# Altium PCB Dekor Natal.PcbDoc (part 2 of 2)
Units mm, origin at the board's own origin, x right, y up, seen from the top; angles counter-clockwise.
Board outline 200 x 100 mm, 4 copper layers (Top Layer, Internal Plane 1, Internal Plane 2, Bottom Layer), stack 0.462 mm thick; 210 components, 0 nets, 807 pads, 0 vias.
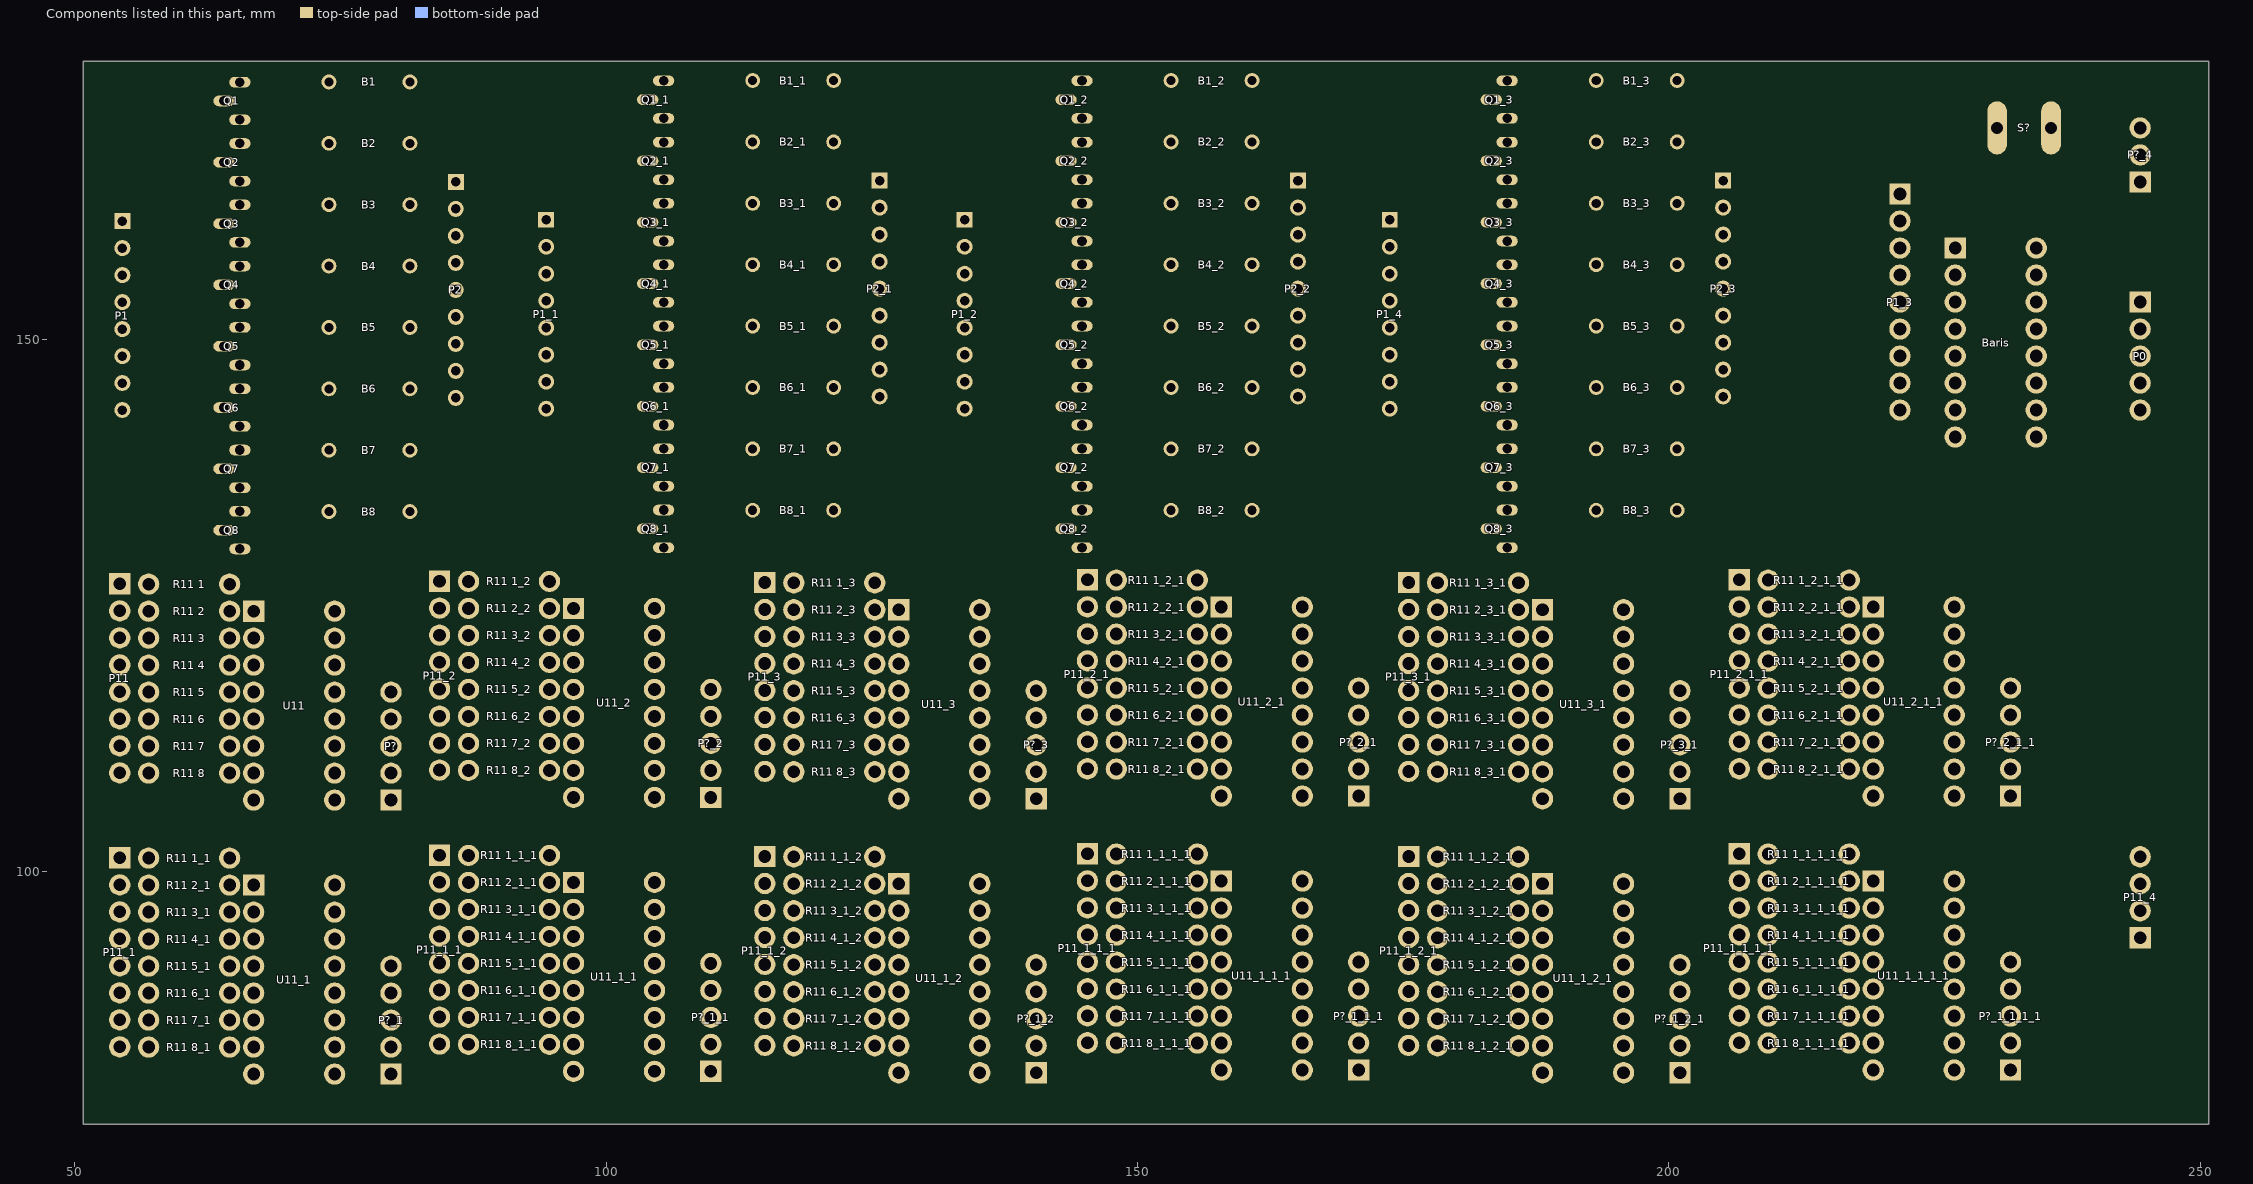
[diagram p4: the components of this part, seen from the top]

## Nets (pads, with @x,y where several pads share a name; then routed paths per layer and width w, separated by ;. In a path a pad name is that pad's centre, name@x,y a point inside that pad or via, vN(x,y) a via of type N, cw(c..) or ccw(c..) an arc to the next point about the centre after c; other vN are vias at no path point) (continued)
copper on no net: | length 3811.2
  Bottom Layer w1: 54.229,83.464 55.601,83.464 55.626,83.439 56.952,83.439 ; 54.229,86.004 55.601,86.004 55.626,85.979 56.952,85.979 ; 54.229,88.544 55.601,88.544 55.626,88.519 56.952,88.519 ; 54.229,91.084 55.601,91.084 55.626,91.059 56.952,91.059 ; 54.229,93.624 55.601,93.624 55.626,93.599 56.952,93.599 ; 54.229,96.164 55.601,96.164 55.626,96.139 56.952,96.139 ; 54.229,98.704 55.601,98.704 55.626,98.679 56.952,98.679 ; 54.229,101.244 55.601,101.244 55.626,101.219 56.952,101.219 ; 54.229,109.245 55.601,109.245 55.626,109.22 56.952,109.22 ; 54.229,111.785 55.601,111.785 55.626,111.76 56.952,111.76 ; 54.229,114.325 55.601,114.325 55.626,114.3 56.952,114.3 ; 54.229,116.865 55.601,116.865 55.626,116.84 56.952,116.84 ; 54.229,119.405 55.601,119.405 55.626,119.38 56.952,119.38 ; 54.229,121.945 55.601,121.945 55.626,121.92 56.952,121.92 ; 54.229,124.485 55.601,124.485 55.626,124.46 56.952,124.46 ; 54.229,127.025 55.601,127.025 55.626,127 56.952,127 ; 54.483,143.383 54.483,141.629 64.032,132.08 ; 54.483,145.923 56.388,145.923 63.221,139.09 64.032,137.849 ; 54.483,148.463 56.845,148.463 61.689,143.619 64.032,143.619 ; 54.483,151.003 58.38,151.003 59.995,149.388 64.032,149.388 ; 54.483,153.543 58.38,153.543 59.995,155.158 64.032,155.158 ; 54.483,156.083 58.293,156.083 62.332,160.122 62.332,160.927 64.032,160.927 ; 54.483,158.623 55.581,158.623 63.221,166.697 64.032,166.697 ; 54.483,161.163 63.221,169.901 63.221,172.466 64.032,172.466 ; 64.572,83.439 66.833,83.439 ; 64.572,85.979 66.833,85.979 ; 64.572,88.519 66.833,88.519 ; 64.572,91.059 66.833,91.059 ; 64.572,93.599 66.833,93.599 ; 64.572,96.139 66.833,96.139 ; 64.572,98.679 66.833,98.679 ; 64.572,101.219 68.072,101.219 73.152,96.139 74.453,96.139 ; 64.572,109.22 66.833,109.22 ; 64.572,111.76 66.833,111.76 ; 64.572,114.3 66.833,114.3 ; 64.572,116.84 66.833,116.84 ; 64.572,119.38 66.833,119.38 ; 64.572,121.92 66.833,121.92 ; 64.572,124.46 66.833,124.46 ; 64.572,127 68.072,127 73.152,121.92 74.453,121.92 ; 65.532,130.31 75.04,130.31 75.921,131.191 75.921,135.001 74.842,136.079 ; 65.532,133.85 70.314,133.85 70.339,133.825 73.914,133.825 ; 65.532,136.079 74.842,136.079 ; 65.532,139.619 69.731,139.619 69.748,139.602 73.914,139.602 ; 65.532,141.849 74.168,141.849 ; 65.532,145.389 69.738,145.389 69.748,145.378 73.914,145.378 ; 65.532,147.618 74.72,147.618 ; 65.532,151.158 67.052,151.158 67.056,151.155 73.914,151.155 ; 65.532,153.388 74.521,153.388 ; 65.532,156.928 69.745,156.928 69.748,156.931 73.914,156.931 ; 65.532,159.157 74.372,159.157 ; 65.532,162.697 73.034,162.697 73.044,162.708 73.914,162.708 ; 65.532,164.927 74.168,164.927 ; 65.532,168.467 69.731,168.467 69.748,168.484 73.914,168.484 ; 65.532,170.696 75.151,170.696 ; 65.532,174.236 69.723,174.236 69.748,174.261 73.914,174.261 ; 74.453,83.439 79.756,83.439 80.518,83.439 82.017,84.938 82.017,93.32 76.657,98.679 74.453,98.679 ; 74.453,85.979 79.756,85.979 ; 74.453,88.519 79.756,88.519 ; 74.453,91.059 72.898,91.059 72.187,90.348 72.187,81.28 71.806,80.899 66.833,80.899 69.094,78.638 77.495,78.638 79.756,80.899 ; 74.453,93.599 77.216,93.599 79.756,91.059 ; 74.453,109.22 79.756,109.22 80.518,109.22 82.017,110.719 82.017,119.101 76.657,124.46 74.453,124.46 ; 74.453,111.76 79.756,111.76 ; 74.453,114.3 79.756,114.3 ; 74.453,116.84 72.898,116.84 72.187,116.129 72.187,107.061 71.806,106.68 66.833,106.68 69.094,104.419 77.495,104.419 79.756,106.68 ; 74.453,119.38 77.216,119.38 79.756,116.84 ; 81.534,133.825 85.852,138.143 85.852,144.526 ; 81.534,139.602 83.541,141.608 83.541,146.431 84.176,147.066 85.852,147.066 ; 81.534,145.378 81.534,148.412 82.423,149.301 84.684,149.301 84.988,149.606 85.852,149.606 ; 81.534,151.155 82.525,152.146 85.852,152.146 ; 81.534,156.931 83.779,154.686 85.852,154.686 ; 81.534,162.708 81.534,160.534 84.842,157.226 85.852,157.226 ; 81.534,168.484 79.534,166.484 79.534,132.997 80.706,131.825 82.362,131.825 87.902,137.365 87.902,158.075 86.701,159.276 86.342,159.276 85.852,159.766 ; 81.534,174.261 88.243,167.552 88.243,163.681 86.868,162.306 85.852,162.306 ; 84.328,83.718 85.7,83.718 85.725,83.693 87.051,83.693 ; 84.328,86.258 85.7,86.258 85.725,86.233 87.051,86.233 ; 84.328,88.798 85.7,88.798 85.725,88.773 87.051,88.773 ; 84.328,91.338 85.7,91.338 85.725,91.313 87.051,91.313 ; 84.328,93.878 85.7,93.878 85.725,93.853 87.051,93.853 ; 84.328,96.418 85.7,96.418 85.725,96.393 87.051,96.393 ; 84.328,98.958 85.7,98.958 85.725,98.933 87.051,98.933 ; 84.328,101.498 85.7,101.498 85.725,101.473 87.051,101.473 ; 84.328,109.499 85.7,109.499 85.725,109.474 87.051,109.474 ; 84.328,112.039 85.7,112.039 85.725,112.014 87.051,112.014 ; 84.328,114.579 85.7,114.579 85.725,114.554 87.051,114.554 ; 84.328,117.119 85.7,117.119 85.725,117.094 87.051,117.094 ; 84.328,119.659 85.7,119.659 85.725,119.634 87.051,119.634 ; 84.328,122.199 85.7,122.199 85.725,122.174 87.051,122.174 ; 84.328,124.739 85.7,124.739 85.725,124.714 87.051,124.714 ; 84.328,127.279 85.7,127.279 85.725,127.254 87.051,127.254 ; 85.852,164.846 83.534,167.164 83.534,169.313 82.151,170.696 75.151,170.696 ; 94.361,143.51 94.361,141.756 103.91,132.207 ; 94.361,146.05 96.266,146.05 103.099,139.217 103.91,137.976 ; 94.361,148.59 96.723,148.59 101.567,143.746 103.91,143.746 ; 94.361,151.13 98.258,151.13 99.873,149.515 103.91,149.515 ; 94.361,153.67 98.258,153.67 99.873,155.285 103.91,155.285 ; 94.361,156.21 98.171,156.21 102.21,160.249 102.21,161.054 103.91,161.054 ; 94.361,158.75 95.459,158.75 103.099,166.824 103.91,166.824 ; 94.361,161.29 103.099,170.028 103.099,172.593 103.91,172.593 ; 94.671,83.693 96.932,83.693 ; 94.671,86.233 96.932,86.233 ; 94.671,88.773 96.932,88.773 ; 94.671,91.313 96.932,91.313 ; 94.671,93.853 96.932,93.853 ; 94.671,96.393 96.932,96.393 ; 94.671,98.933 96.932,98.933 ; 94.671,101.473 98.171,101.473 103.251,96.393 104.552,96.393 ; 94.671,109.474 96.932,109.474 ; 94.671,112.014 96.932,112.014 ; 94.671,114.554 96.932,114.554 ; 94.671,117.094 96.932,117.094 ; 94.671,119.634 96.932,119.634 ; 94.671,122.174 96.932,122.174 ; 94.671,124.714 96.932,124.714 ; 94.671,127.254 98.171,127.254 103.251,122.174 104.552,122.174 ; 104.552,83.693 109.855,83.693 110.617,83.693 112.116,85.192 112.116,93.574 106.756,98.933 104.552,98.933 ; 104.552,86.233 109.855,86.233 ; 104.552,88.773 109.855,88.773 ; 104.552,91.313 102.997,91.313 102.286,90.602 102.286,81.534 101.905,81.153 96.932,81.153 99.193,78.892 107.594,78.892 109.855,81.153 ; 104.552,93.853 107.315,93.853 109.855,91.313 ; 104.552,109.474 109.855,109.474 110.617,109.474 112.116,110.973 112.116,119.355 106.756,124.714 104.552,124.714 ; 104.552,112.014 109.855,112.014 ; 104.552,114.554 109.855,114.554 ; 104.552,117.094 102.997,117.094 102.286,116.383 102.286,107.315 101.905,106.934 96.932,106.934 99.193,104.673 107.594,104.673 109.855,106.934 ; 104.552,119.634 107.315,119.634 109.855,117.094 ; 105.41,130.437 114.918,130.437 115.799,131.318 115.799,135.128 114.72,136.206 ; 105.41,133.977 110.192,133.977 110.217,133.952 113.792,133.952 ; 105.41,136.206 114.72,136.206 ; 105.41,139.746 109.609,139.746 109.626,139.729 113.792,139.729 ; 105.41,141.976 114.046,141.976 ; 105.41,145.516 109.616,145.516 109.626,145.505 113.792,145.505 ; 105.41,147.745 114.598,147.745 ; 105.41,151.285 106.93,151.285 106.934,151.282 113.792,151.282 ; 105.41,153.515 114.399,153.515 ; 105.41,157.055 109.623,157.055 109.626,157.058 113.792,157.058 ; 105.41,159.284 114.25,159.284 ; 105.41,162.824 112.912,162.824 112.922,162.835 113.792,162.835 ; 105.41,165.054 114.046,165.054 ; 105.41,168.594 109.609,168.594 109.626,168.611 113.792,168.611 ; 105.41,170.823 115.029,170.823 ; 105.41,174.363 109.601,174.363 109.626,174.388 113.792,174.388 ; 114.935,83.591 116.307,83.591 116.332,83.566 117.658,83.566 ; 114.935,86.131 116.307,86.131 116.332,86.106 117.658,86.106 ; 114.935,88.671 116.307,88.671 116.332,88.646 117.658,88.646 ; 114.935,91.211 116.307,91.211 116.332,91.186 117.658,91.186 ; 114.935,93.751 116.307,93.751 116.332,93.726 117.658,93.726 ; 114.935,96.291 116.307,96.291 116.332,96.266 117.658,96.266 ; 114.935,98.831 116.307,98.831 116.332,98.806 117.658,98.806 ; 114.935,101.371 116.307,101.371 116.332,101.346 117.658,101.346 ; 114.935,109.372 116.307,109.372 116.332,109.347 117.658,109.347 ; 114.935,111.912 116.307,111.912 116.332,111.887 117.658,111.887 ; 114.935,114.452 116.307,114.452 116.332,114.427 117.658,114.427 ; 114.935,116.992 116.307,116.992 116.332,116.967 117.658,116.967 ; 114.935,119.532 116.307,119.532 116.332,119.507 117.658,119.507 ; 114.935,122.072 116.307,122.072 116.332,122.047 117.658,122.047 ; 114.935,124.612 116.307,124.612 116.332,124.587 117.658,124.587 ; 114.935,127.152 116.307,127.152 116.332,127.127 117.658,127.127 ; 121.412,133.952 125.73,138.27 125.73,144.653 ; 121.412,139.729 123.419,141.735 123.419,146.558 124.054,147.193 125.73,147.193 ; 121.412,145.505 121.412,148.539 122.301,149.428 124.562,149.428 124.866,149.733 125.73,149.733 ; 121.412,151.282 122.403,152.273 125.73,152.273 ; 121.412,157.058 123.657,154.813 125.73,154.813 ; 121.412,162.835 121.412,160.661 124.72,157.353 125.73,157.353 ; 121.412,168.611 119.412,166.611 119.412,133.124 120.584,131.952 122.24,131.952 127.78,137.492 127.78,158.202 126.579,159.403 126.22,159.403 125.73,159.893 ; 121.412,174.388 128.121,167.679 128.121,163.808 126.746,162.433 125.73,162.433 ; 125.278,83.566 127.539,83.566 ; 125.278,86.106 127.539,86.106 ; 125.278,88.646 127.539,88.646 ; 125.278,91.186 127.539,91.186 ; 125.278,93.726 127.539,93.726 ; 125.278,96.266 127.539,96.266 ; 125.278,98.806 127.539,98.806 ; 125.278,101.346 128.778,101.346 133.858,96.266 135.159,96.266 ; 125.278,109.347 127.539,109.347 ; 125.278,111.887 127.539,111.887 ; 125.278,114.427 127.539,114.427 ; 125.278,116.967 127.539,116.967 ; 125.278,119.507 127.539,119.507 ; 125.278,122.047 127.539,122.047 ; 125.278,124.587 127.539,124.587 ; 125.278,127.127 128.778,127.127 133.858,122.047 135.159,122.047 ; 125.73,164.973 123.412,167.291 123.412,169.44 122.029,170.823 115.029,170.823 ; 133.731,143.51 133.731,141.756 143.28,132.207 ; 133.731,146.05 135.636,146.05 142.469,139.217 143.28,137.976 ; 133.731,148.59 136.093,148.59 140.937,143.746 143.28,143.746 ; 133.731,151.13 137.628,151.13 139.243,149.515 143.28,149.515 ; 133.731,153.67 137.628,153.67 139.243,155.285 143.28,155.285 ; 133.731,156.21 137.541,156.21 141.58,160.249 141.58,161.054 143.28,161.054 ; 133.731,158.75 134.829,158.75 142.469,166.824 143.28,166.824 ; 133.731,161.29 142.469,170.028 142.469,172.593 143.28,172.593 ; 135.159,83.566 140.462,83.566 141.224,83.566 142.723,85.065 142.723,93.447 137.363,98.806 135.159,98.806 ; 135.159,86.106 140.462,86.106 ; 135.159,88.646 140.462,88.646 ; 135.159,91.186 133.604,91.186 132.893,90.475 132.893,81.407 132.512,81.026 127.539,81.026 129.8,78.765 138.201,78.765 140.462,81.026 ; 135.159,93.726 137.922,93.726 140.462,91.186 ; 135.159,109.347 140.462,109.347 141.224,109.347 142.723,110.846 142.723,119.228 137.363,124.587 135.159,124.587 ; 135.159,111.887 140.462,111.887 ; 135.159,114.427 140.462,114.427 ; 135.159,116.967 133.604,116.967 132.893,116.256 132.893,107.188 132.512,106.807 127.539,106.807 129.8,104.546 138.201,104.546 140.462,106.807 ; 135.159,119.507 137.922,119.507 140.462,116.967 ; 144.78,130.437 154.288,130.437 155.169,131.318 155.169,135.128 154.09,136.206 ; 144.78,133.977 149.562,133.977 149.587,133.952 153.162,133.952 ; 144.78,136.206 154.09,136.206 ; 144.78,139.746 148.979,139.746 148.996,139.729 153.162,139.729 ; 144.78,141.976 153.416,141.976 ; 144.78,145.516 148.986,145.516 148.996,145.505 153.162,145.505 ; 144.78,147.745 153.968,147.745 ; 144.78,151.285 146.3,151.285 146.304,151.282 153.162,151.282 ; 144.78,153.515 153.769,153.515 ; 144.78,157.055 148.993,157.055 148.996,157.058 153.162,157.058 ; 144.78,159.284 153.62,159.284 ; 144.78,162.824 152.282,162.824 152.292,162.835 153.162,162.835 ; 144.78,165.054 153.416,165.054 ; 144.78,168.594 148.979,168.594 148.996,168.611 153.162,168.611 ; 144.78,170.823 154.399,170.823 ; 144.78,174.363 148.971,174.363 148.996,174.388 153.162,174.388 ; 145.288,83.845 146.66,83.845 146.685,83.82 148.011,83.82 ; 145.288,86.385 146.66,86.385 146.685,86.36 148.011,86.36 ; 145.288,88.925 146.66,88.925 146.685,88.9 148.011,88.9 ; 145.288,91.465 146.66,91.465 146.685,91.44 148.011,91.44 ; 145.288,94.005 146.66,94.005 146.685,93.98 148.011,93.98 ; 145.288,96.545 146.66,96.545 146.685,96.52 148.011,96.52 ; 145.288,99.085 146.66,99.085 146.685,99.06 148.011,99.06 ; 145.288,101.625 146.66,101.625 146.685,101.6 148.011,101.6 ; 145.288,109.626 146.66,109.626 146.685,109.601 148.011,109.601 ; 145.288,112.166 146.66,112.166 146.685,112.141 148.011,112.141 ; 145.288,114.706 146.66,114.706 146.685,114.681 148.011,114.681 ; 145.288,117.246 146.66,117.246 146.685,117.221 148.011,117.221 ; 145.288,119.786 146.66,119.786 146.685,119.761 148.011,119.761 ; 145.288,122.326 146.66,122.326 146.685,122.301 148.011,122.301 ; 145.288,124.866 146.66,124.866 146.685,124.841 148.011,124.841 ; 145.288,127.406 146.66,127.406 146.685,127.381 148.011,127.381 ; 155.631,83.82 157.892,83.82 ; 155.631,86.36 157.892,86.36 ; 155.631,88.9 157.892,88.9 ; 155.631,91.44 157.892,91.44 ; 155.631,93.98 157.892,93.98 ; 155.631,96.52 157.892,96.52 ; 155.631,99.06 157.892,99.06 ; 155.631,101.6 159.131,101.6 164.211,96.52 165.512,96.52 ; 155.631,109.601 157.892,109.601 ; 155.631,112.141 157.892,112.141 ; 155.631,114.681 157.892,114.681 ; 155.631,117.221 157.892,117.221 ; 155.631,119.761 157.892,119.761 ; 155.631,122.301 157.892,122.301 ; 155.631,124.841 157.892,124.841 ; 155.631,127.381 159.131,127.381 164.211,122.301 165.512,122.301 ; 160.782,133.952 165.1,138.27 165.1,144.653 ; 160.782,139.729 162.789,141.735 162.789,146.558 163.424,147.193 165.1,147.193 ; 160.782,145.505 160.782,148.539 161.671,149.428 163.932,149.428 164.236,149.733 165.1,149.733 ; 160.782,151.282 161.773,152.273 165.1,152.273 ; 160.782,157.058 163.027,154.813 165.1,154.813 ; 160.782,162.835 160.782,160.661 164.09,157.353 165.1,157.353 ; 160.782,168.611 158.782,166.611 158.782,133.124 159.954,131.952 161.61,131.952 167.15,137.492 167.15,158.202 165.949,159.403 165.59,159.403 165.1,159.893 ; 160.782,174.388 167.491,167.679 167.491,163.808 166.116,162.433 165.1,162.433 ; 165.1,164.973 162.782,167.291 162.782,169.44 161.399,170.823 154.399,170.823 ; 165.512,83.82 170.815,83.82 171.577,83.82 173.076,85.319 173.076,93.701 167.716,99.06 165.512,99.06 ; 165.512,86.36 170.815,86.36 ; 165.512,88.9 170.815,88.9 ; 165.512,91.44 163.957,91.44 163.246,90.729 163.246,81.661 162.865,81.28 157.892,81.28 160.153,79.019 168.554,79.019 170.815,81.28 ; 165.512,93.98 168.275,93.98 170.815,91.44 ; 165.512,109.601 170.815,109.601 171.577,109.601 173.076,111.1 173.076,119.482 167.716,124.841 165.512,124.841 ; 165.512,112.141 170.815,112.141 ; 165.512,114.681 170.815,114.681 ; 165.512,117.221 163.957,117.221 163.246,116.51 163.246,107.442 162.865,107.061 157.892,107.061 160.153,104.8 168.554,104.8 170.815,107.061 ; 165.512,119.761 168.275,119.761 170.815,117.221 ; 173.736,143.51 173.736,141.756 183.285,132.207 ; 173.736,146.05 175.641,146.05 182.474,139.217 183.285,137.976 ; 173.736,148.59 176.098,148.59 180.942,143.746 183.285,143.746 ; 173.736,151.13 177.633,151.13 179.248,149.515 183.285,149.515 ; 173.736,153.67 177.633,153.67 179.248,155.285 183.285,155.285 ; 173.736,156.21 177.546,156.21 181.585,160.249 181.585,161.054 183.285,161.054 ; 173.736,158.75 174.834,158.75 182.474,166.824 183.285,166.824 ; 173.736,161.29 182.474,170.028 182.474,172.593 183.285,172.593 ; 175.514,83.591 176.886,83.591 176.911,83.566 178.237,83.566 ; 175.514,86.131 176.886,86.131 176.911,86.106 178.237,86.106 ; 175.514,88.671 176.886,88.671 176.911,88.646 178.237,88.646 ; 175.514,91.211 176.886,91.211 176.911,91.186 178.237,91.186 ; 175.514,93.751 176.886,93.751 176.911,93.726 178.237,93.726 ; 175.514,96.291 176.886,96.291 176.911,96.266 178.237,96.266 ; 175.514,98.831 176.886,98.831 176.911,98.806 178.237,98.806 ; 175.514,101.371 176.886,101.371 176.911,101.346 178.237,101.346 ; 175.514,109.372 176.886,109.372 176.911,109.347 178.237,109.347 ; 175.514,111.912 176.886,111.912 176.911,111.887 178.237,111.887 ; 175.514,114.452 176.886,114.452 176.911,114.427 178.237,114.427 ; 175.514,116.992 176.886,116.992 176.911,116.967 178.237,116.967 ; 175.514,119.532 176.886,119.532 176.911,119.507 178.237,119.507 ; 175.514,122.072 176.886,122.072 176.911,122.047 178.237,122.047 ; 175.514,124.612 176.886,124.612 176.911,124.587 178.237,124.587 ; 175.514,127.152 176.886,127.152 176.911,127.127 178.237,127.127 ; 184.785,130.437 194.293,130.437 195.174,131.318 195.174,135.128 194.095,136.206 ; 184.785,133.977 189.567,133.977 189.592,133.952 193.167,133.952 ; 184.785,136.206 194.095,136.206 ; 184.785,139.746 188.984,139.746 189.001,139.729 193.167,139.729 ; 184.785,141.976 193.421,141.976 ; 184.785,145.516 188.991,145.516 189.001,145.505 193.167,145.505 ; 184.785,147.745 193.973,147.745 ; 184.785,151.285 186.305,151.285 186.309,151.282 193.167,151.282 ; 184.785,153.515 193.774,153.515 ; 184.785,157.055 188.998,157.055 189.001,157.058 193.167,157.058 ; 184.785,159.284 193.625,159.284 ; 184.785,162.824 192.287,162.824 192.297,162.835 193.167,162.835 ; 184.785,165.054 193.421,165.054 ; 184.785,168.594 188.984,168.594 189.001,168.611 193.167,168.611 ; 184.785,170.823 194.404,170.823 ; 184.785,174.363 188.976,174.363 189.001,174.388 193.167,174.388 ; 185.857,83.566 188.118,83.566 ; 185.857,86.106 188.118,86.106 ; 185.857,88.646 188.118,88.646 ; 185.857,91.186 188.118,91.186 ; 185.857,93.726 188.118,93.726 ; 185.857,96.266 188.118,96.266 ; 185.857,98.806 188.118,98.806 ; 185.857,101.346 189.357,101.346 194.437,96.266 195.738,96.266 ; 185.857,109.347 188.118,109.347 ; 185.857,111.887 188.118,111.887 ; 185.857,114.427 188.118,114.427 ; 185.857,116.967 188.118,116.967 ; 185.857,119.507 188.118,119.507 ; 185.857,122.047 188.118,122.047 ; 185.857,124.587 188.118,124.587 ; 185.857,127.127 189.357,127.127 194.437,122.047 195.738,122.047 ; 195.738,83.566 201.041,83.566 201.803,83.566 203.302,85.065 203.302,93.447 197.942,98.806 195.738,98.806 ; 195.738,86.106 201.041,86.106 ; 195.738,88.646 201.041,88.646 ; 195.738,91.186 194.183,91.186 193.472,90.475 193.472,81.407 193.091,81.026 188.118,81.026 190.379,78.765 198.78,78.765 201.041,81.026 ; 195.738,93.726 198.501,93.726 201.041,91.186 ; 195.738,109.347 201.041,109.347 201.803,109.347 203.302,110.846 203.302,119.228 197.942,124.587 195.738,124.587 ; 195.738,111.887 201.041,111.887 ; 195.738,114.427 201.041,114.427 ; 195.738,116.967 194.183,116.967 193.472,116.256 193.472,107.188 193.091,106.807 188.118,106.807 190.379,104.546 198.78,104.546 201.041,106.807 ; 195.738,119.507 198.501,119.507 201.041,116.967 ; 200.787,133.952 205.105,138.27 205.105,144.653 ; 200.787,139.729 202.794,141.735 202.794,146.558 203.429,147.193 205.105,147.193 ; 200.787,145.505 200.787,148.539 201.676,149.428 203.937,149.428 204.241,149.733 205.105,149.733 ; 200.787,151.282 201.778,152.273 205.105,152.273 ; 200.787,157.058 203.032,154.813 205.105,154.813 ; 200.787,162.835 200.787,160.661 204.095,157.353 205.105,157.353 ; 200.787,168.611 198.787,166.611 198.787,133.124 199.959,131.952 201.615,131.952 207.155,137.492 207.155,158.202 205.954,159.403 205.595,159.403 205.105,159.893 ; 200.787,174.388 207.496,167.679 207.496,163.808 206.121,162.433 205.105,162.433 ; 205.105,164.973 202.787,167.291 202.787,169.44 201.404,170.823 194.404,170.823 ; 206.629,83.845 208.001,83.845 208.026,83.82 209.352,83.82 ; 206.629,86.385 208.001,86.385 208.026,86.36 209.352,86.36 ; 206.629,88.925 208.001,88.925 208.026,88.9 209.352,88.9 ; 206.629,91.465 208.001,91.465 208.026,91.44 209.352,91.44 ; 206.629,94.005 208.001,94.005 208.026,93.98 209.352,93.98 ; 206.629,96.545 208.001,96.545 208.026,96.52 209.352,96.52 ; 206.629,99.085 208.001,99.085 208.026,99.06 209.352,99.06 ; 206.629,101.625 208.001,101.625 208.026,101.6 209.352,101.6 ; 206.629,109.626 208.001,109.626 208.026,109.601 209.352,109.601 ; 206.629,112.166 208.001,112.166 208.026,112.141 209.352,112.141 ; 206.629,114.706 208.001,114.706 208.026,114.681 209.352,114.681 ; 206.629,117.246 208.001,117.246 208.026,117.221 209.352,117.221 ; 206.629,119.786 208.001,119.786 208.026,119.761 209.352,119.761 ; 206.629,122.326 208.001,122.326 208.026,122.301 209.352,122.301 ; 206.629,124.866 208.001,124.866 208.026,124.841 209.352,124.841 ; 206.629,127.406 208.001,127.406 208.026,127.381 209.352,127.381 ; 216.972,83.82 219.233,83.82 ; 216.972,86.36 219.233,86.36 ; 216.972,88.9 219.233,88.9 ; 216.972,91.44 219.233,91.44 ; 216.972,93.98 219.233,93.98 ; 216.972,96.52 219.233,96.52 ; 216.972,99.06 219.233,99.06 ; 216.972,101.6 220.472,101.6 225.552,96.52 226.853,96.52 ; 216.972,109.601 219.233,109.601 ; 216.972,112.141 219.233,112.141 ; 216.972,114.681 219.233,114.681 ; 216.972,117.221 219.233,117.221 ; 216.972,119.761 219.233,119.761 ; 216.972,122.301 219.233,122.301 ; 216.972,124.841 219.233,124.841 ; 216.972,127.381 220.472,127.381 225.552,122.301 226.853,122.301 ; 221.742,143.383 226.949,143.383 ; 221.742,145.923 226.949,145.923 ; 221.742,148.463 226.949,148.463 ; 221.742,151.003 226.949,151.003 ; 221.742,153.543 226.949,153.543 ; 221.742,156.083 226.949,156.083 ; 221.742,158.623 226.949,158.623 ; 221.742,161.163 228.6,161.163 229.235,160.528 229.235,159.385 232.537,156.083 234.569,156.083 ; 221.742,163.703 220.345,163.703 219.481,162.839 219.481,141.605 220.243,140.843 226.949,140.843 ; 226.853,83.82 232.156,83.82 232.918,83.82 234.417,85.319 234.417,93.701 229.057,99.06 226.853,99.06 ; 226.853,86.36 232.156,86.36 ; 226.853,88.9 232.156,88.9 ; 226.853,91.44 225.298,91.44 224.587,90.729 224.587,81.661 224.206,81.28 219.233,81.28 221.494,79.019 229.895,79.019 232.156,81.28 ; 226.853,93.98 229.616,93.98 232.156,91.44 ; 226.853,109.601 232.156,109.601 232.918,109.601 234.417,111.1 234.417,119.482 229.057,124.841 226.853,124.841 ; 226.853,112.141 232.156,112.141 ; 226.853,114.681 232.156,114.681 ; 226.853,117.221 225.298,117.221 224.587,116.51 224.587,107.442 224.206,107.061 219.233,107.061 221.494,104.8 229.895,104.8 232.156,107.061 ; 226.853,119.761 229.616,119.761 232.156,117.221 ; 230.886,169.926 230.886,166.853 ; 234.569,143.383 235.687,143.383 242.252,136.818 242.252,105.26 240.098,103.106 240.098,99.586 242.878,96.806 243.166,96.806 243.416,96.556 244.348,96.556 244.348,96.266 245.745,96.266 246.609,95.402 246.609,92.329 245.745,91.465 242.561,91.465 236.098,97.929 236.098,104.763 238.252,106.917 238.252,126.111 225.52,138.843 219.415,138.843 217.481,140.777 217.481,165.271 219.063,166.853 230.886,166.853 ; 234.569,145.923 244.348,145.923 ; 234.569,148.463 244.348,148.463 245.745,148.463 246.978,147.23 246.978,103.976 244.348,101.346 ; 234.569,153.543 236.068,153.543 236.83,154.305 236.83,161.265 233.528,164.567 233.528,173.152 234.315,173.939 244.856,173.939 246.609,172.187 246.609,152.07 245.542,151.003 244.348,151.003 ; 234.569,158.623 230.886,162.306 230.886,166.853 ; 235.966,169.926 235.966,169.912 241.132,169.912 241.146,169.926 244.348,169.926 ; 244.348,93.726 243.129,93.726 238.098,98.757 238.098,103.935 240.252,106.089 240.252,127.54 226.949,140.843 ; 244.348,98.806 244.252,98.806 243.962,99.096 243.416,99.096 242.098,100.414 242.098,102.278 244.348,104.528 244.348,143.383 ; 244.348,164.846 244.348,153.543 241.986,153.543 239.446,151.003 234.569,151.003 230.2,151.003 229.743,150.546 229.743,142.621 227.965,140.843 226.949,140.843 ; 74.168,141.849 76.2,143.881 76.2,146.221 74.803,147.618 74.72,147.618 ; 74.168,141.849 74.686,141.849 76.073,140.462 76.073,137.16 74.992,136.079 74.842,136.079 ; 74.168,164.927 75.205,164.927 76.327,163.805 76.327,161.112 74.372,159.157 ; 74.168,164.927 75.921,166.679 75.921,169.926 75.151,170.696 ; 74.372,159.157 76.428,157.861 76.428,155.295 74.521,153.388 ; 74.521,153.388 74.803,153.388 75.921,152.27 75.921,148.819 74.72,147.618 ; 114.046,141.976 114.564,141.976 115.951,140.589 115.951,137.287 114.87,136.206 114.72,136.206 ; 114.046,141.976 116.078,144.008 116.078,146.348 114.681,147.745 114.598,147.745 ; 114.046,165.054 115.799,166.806 115.799,170.053 115.029,170.823 ; 114.046,165.054 115.083,165.054 116.205,163.932 116.205,161.239 114.25,159.284 ; 114.25,159.284 116.306,157.988 116.306,155.422 114.399,153.515 ; 114.399,153.515 114.681,153.515 115.799,152.397 115.799,148.946 114.598,147.745 ; 153.416,141.976 153.934,141.976 155.321,140.589 155.321,137.287 154.24,136.206 154.09,136.206 ; 153.416,141.976 155.448,144.008 155.448,146.348 154.051,147.745 153.968,147.745 ; 153.416,165.054 155.169,166.806 155.169,170.053 154.399,170.823 ; 153.416,165.054 154.453,165.054 155.575,163.932 155.575,161.239 153.62,159.284 ; 153.62,159.284 155.676,157.988 155.676,155.422 153.769,153.515 ; 153.769,153.515 154.051,153.515 155.169,152.397 155.169,148.946 153.968,147.745 ; 193.421,141.976 193.939,141.976 195.326,140.589 195.326,137.287 194.245,136.206 194.095,136.206 ; 193.421,141.976 195.453,144.008 195.453,146.348 194.056,147.745 193.973,147.745 ; 193.421,165.054 195.174,166.806 195.174,170.053 194.404,170.823 ; 193.421,165.054 194.458,165.054 195.58,163.932 195.58,161.239 193.625,159.284 ; 193.625,159.284 195.681,157.988 195.681,155.422 193.774,153.515 ; 193.774,153.515 194.056,153.515 195.174,152.397 195.174,148.946 193.973,147.745

## Polygon pours and split planes (outlines as drawn)
no net on Bottom Layer "Top Layer-No Net" (solid, pour order 13): 250.8,176.2 50.8,176.2 50.8,76.2 250.8,76.2

## Silkscreen, mask and mechanical layers (free items; w line width, h text height)
Drill Drawing:
  text ".LEGEND" at 255.88,81.28 h1.52
  text "Drill Drawing." at 255.88,78.74 h1.52

## Dimensions
52.1,77.5 to 249.5,77.5 on Mechanical 1
52.1,77.5 to 52.1,174.9 on Mechanical 1